# Altium PCB PCB1.PcbDoc
Units mil, origin at the board's own origin, x right, y up, seen from the top; angles counter-clockwise.
Board outline 7409.94 x 4335 mil, 4 copper layers (Top Layer 1, Power, Ground, Bottom Layer 1), stack 23.712 mil thick; 35 components, 28 nets, 160 pads, 26 vias.
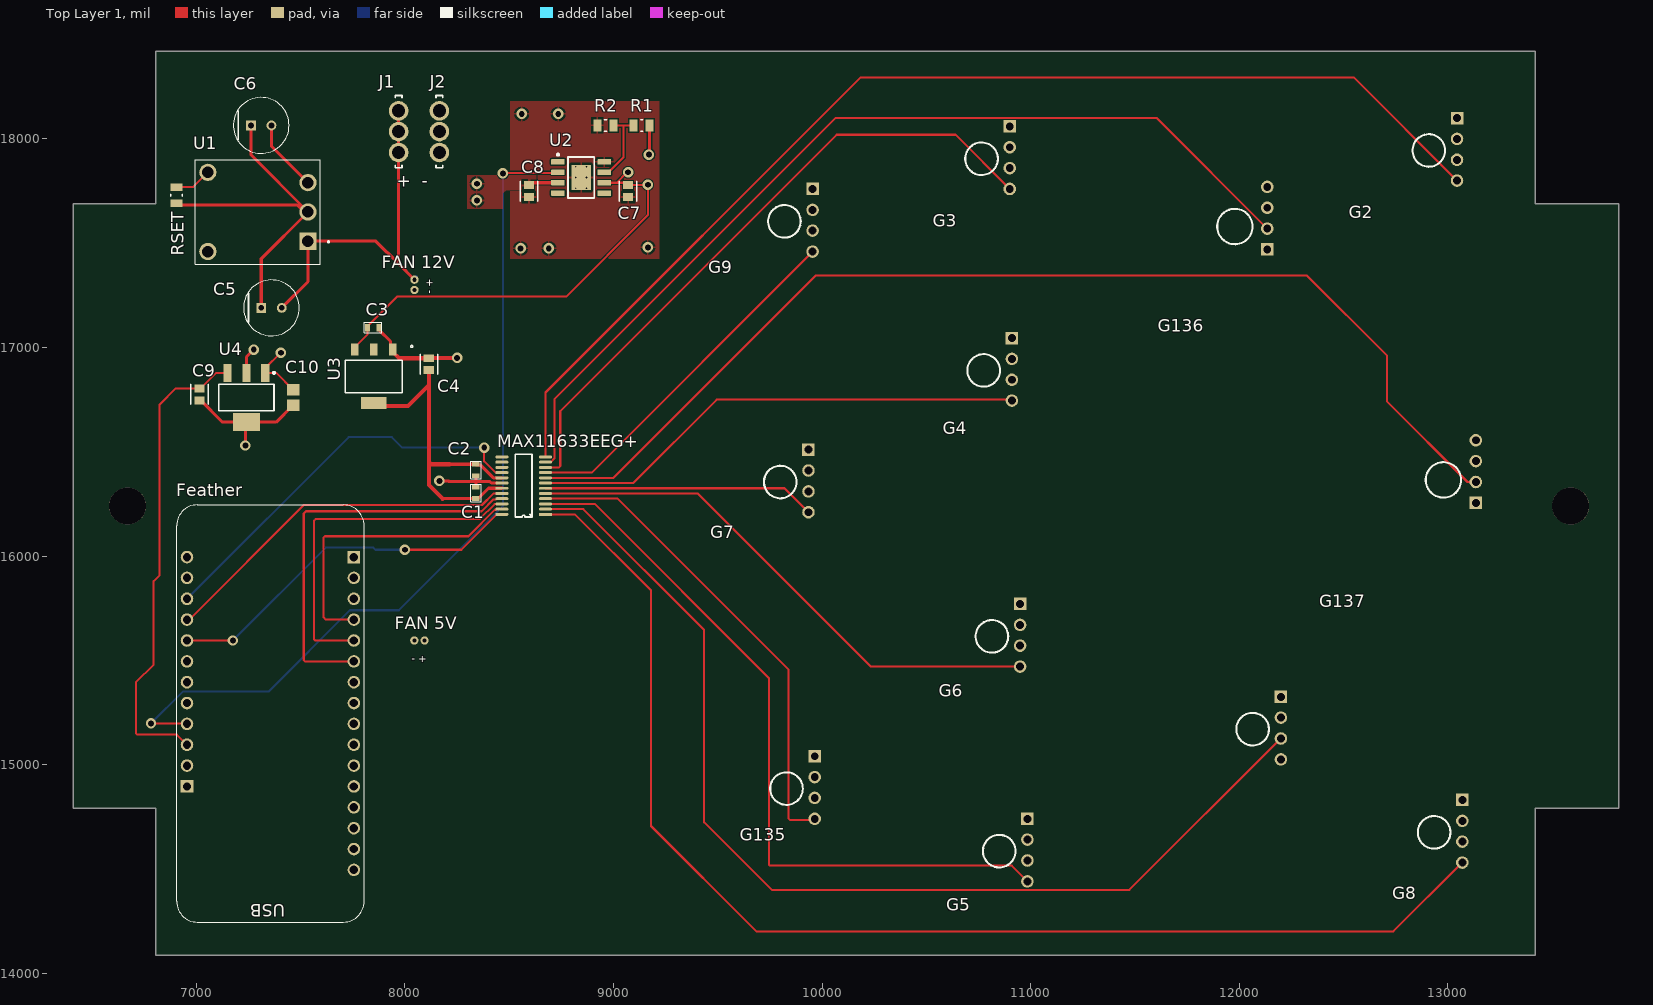
[diagram p0: Top Layer 1 view]
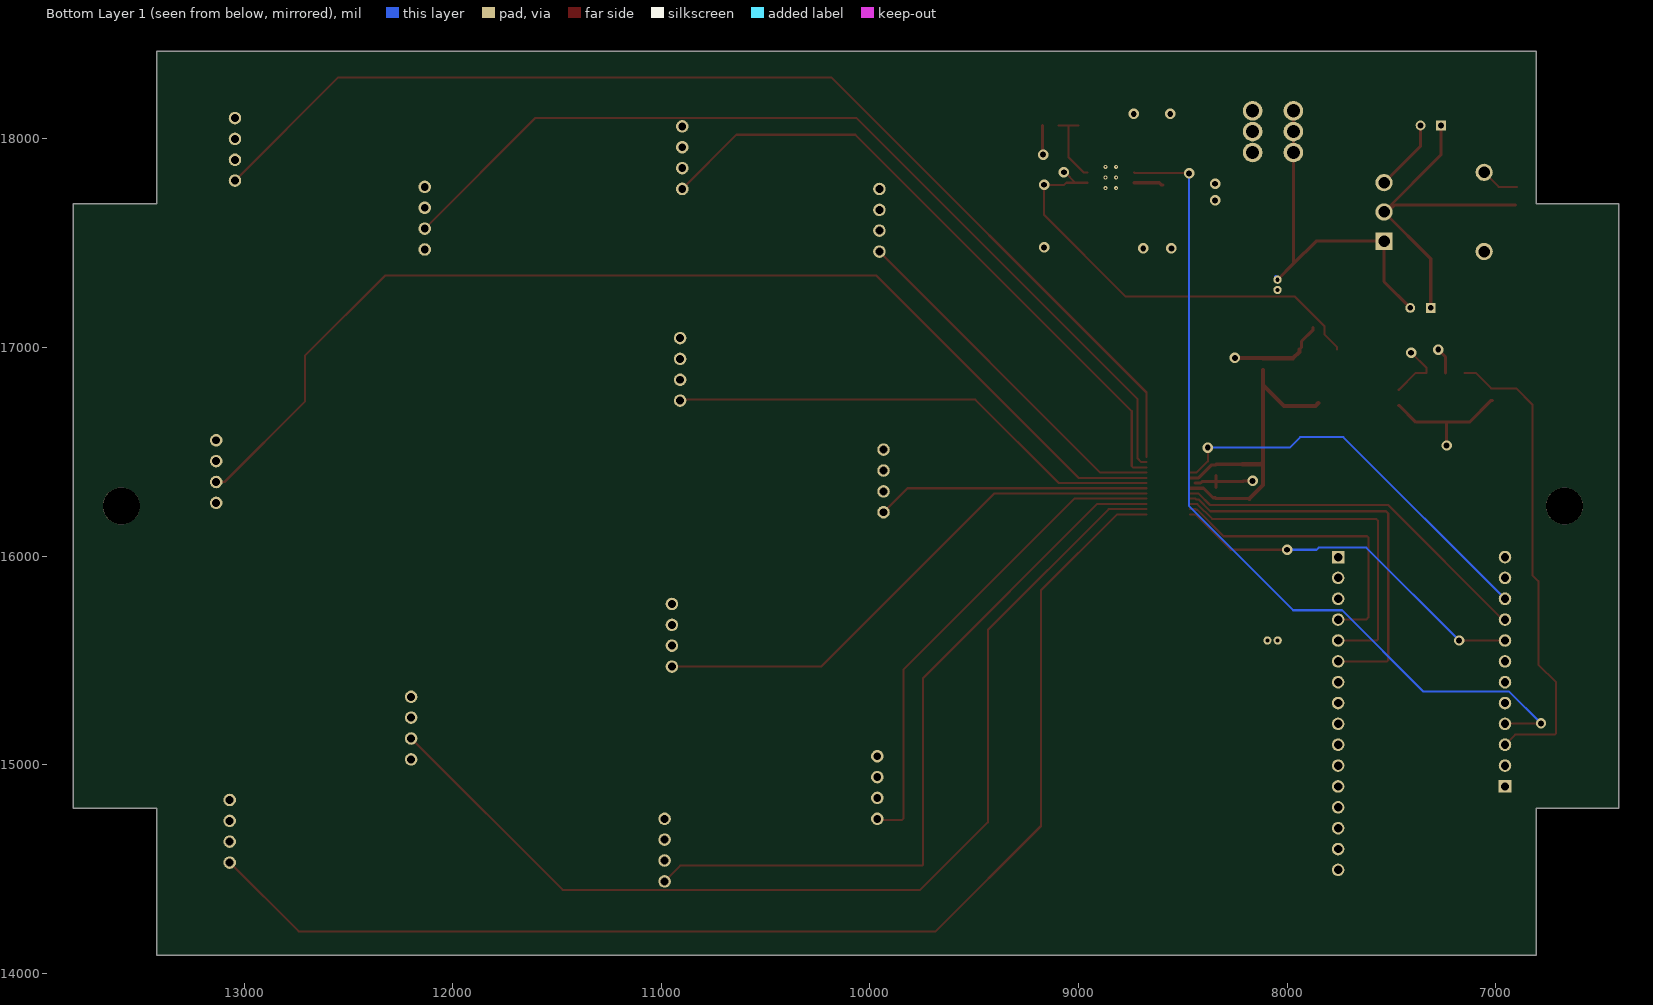
[diagram p1: Bottom Layer 1 view, seen from below]
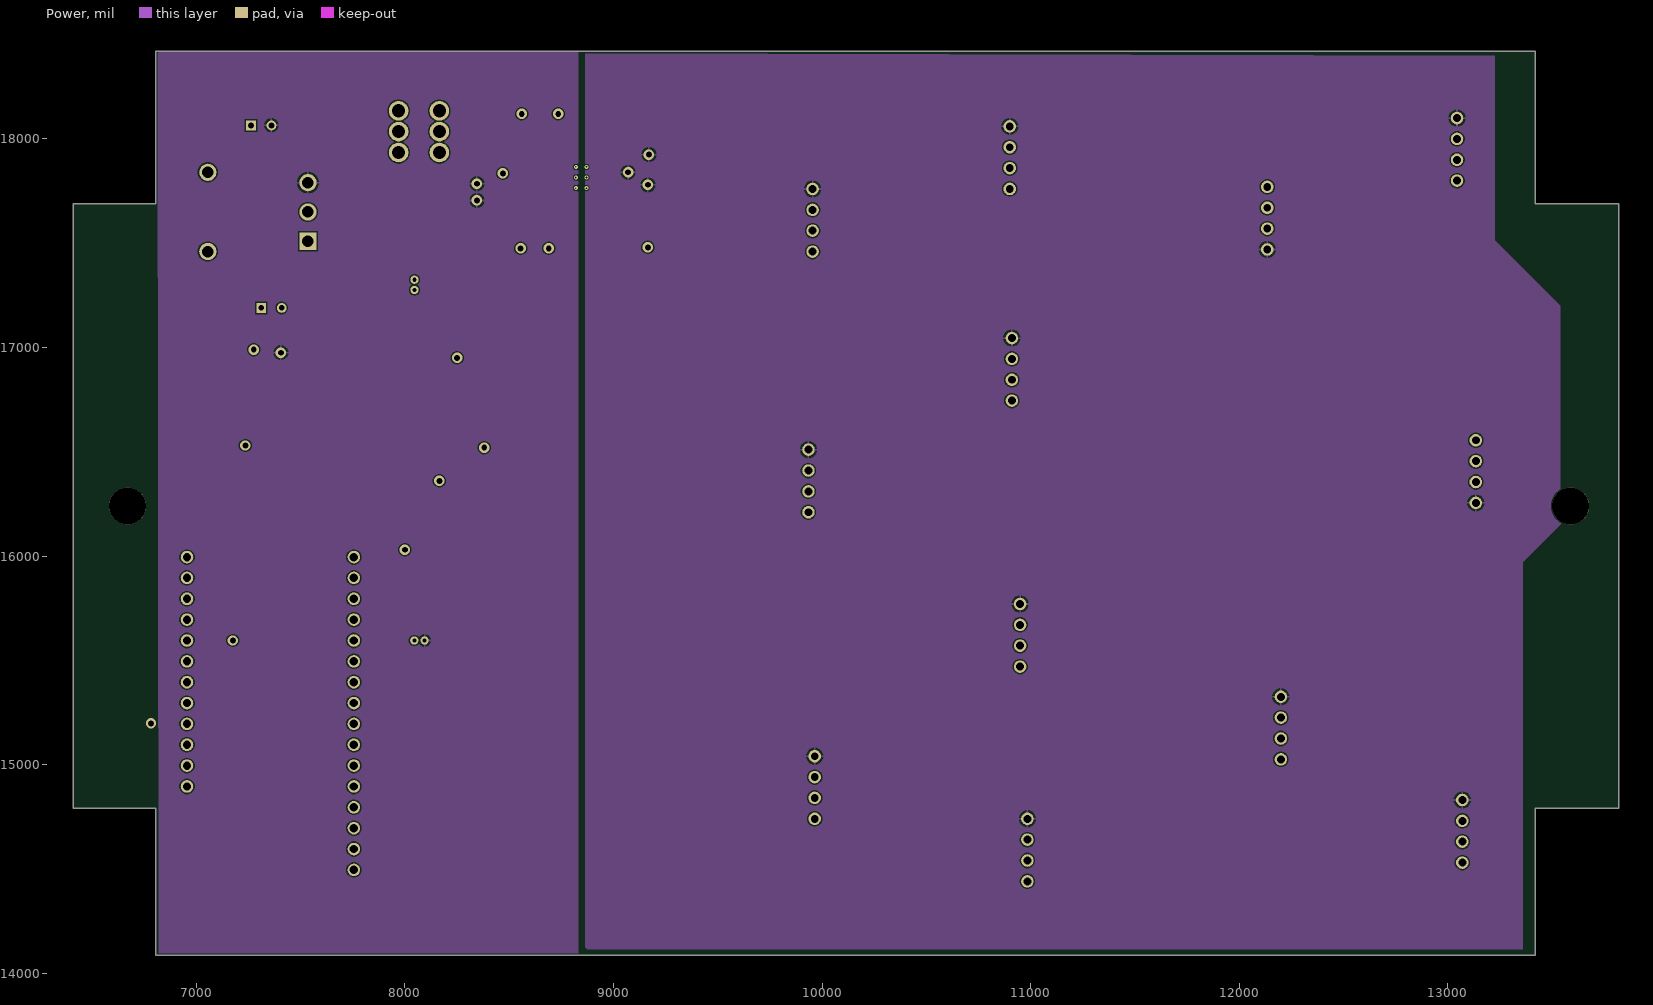
[diagram p2: Power]
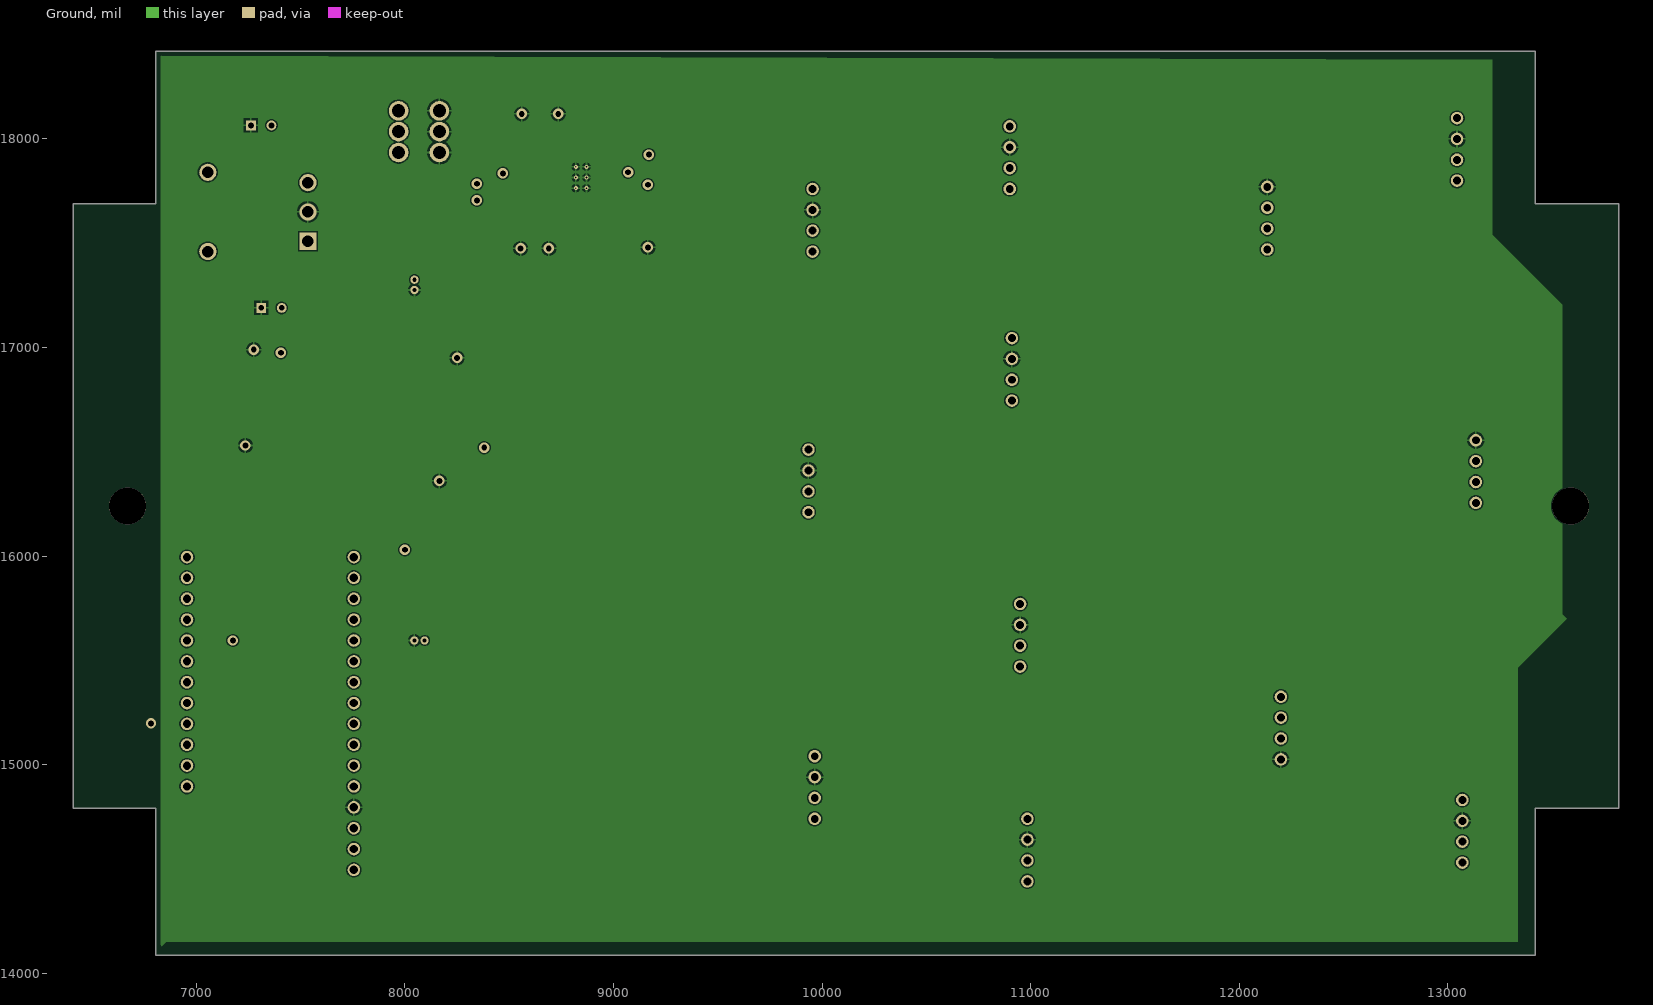
[diagram p3: Ground]
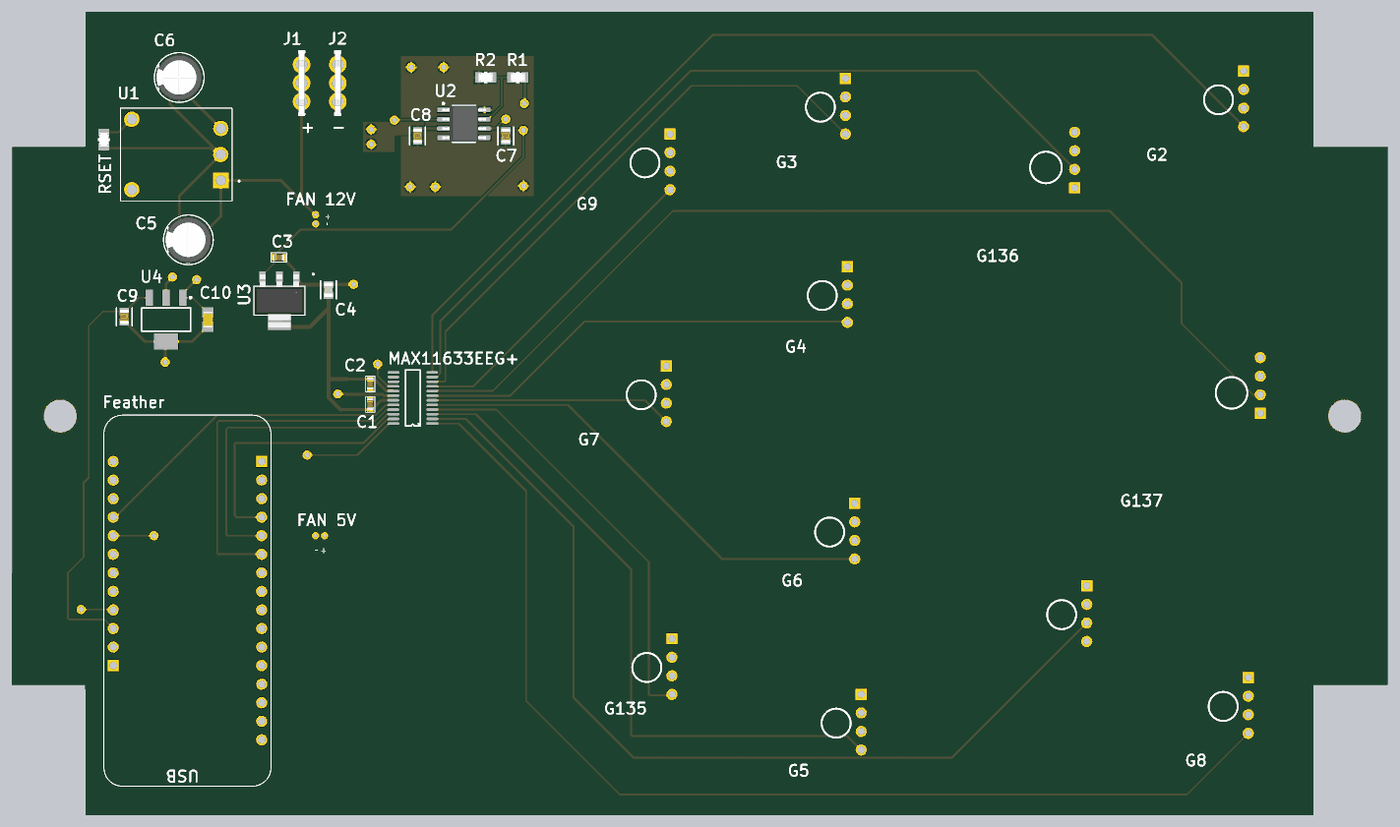
[diagram p4: 3D render of the assembled board from above, using the file's embedded part models]

## Layer stack, top to bottom
Top Solder: solder mask 0.4, Solder Resist, Dk 3.5
Top Layer 1: signal copper 1.378
Dielectric 2: prepreg 2.8, PP-006, Dk 4.1
Power: signal copper 1.378
Dielectric 1: dielectric 12.6, FR-4, Dk 4.8
Ground: signal copper 1.378
Dielectric 3: prepreg 2.8, PP-006, Dk 4.1
Bottom Layer 1: signal copper 1.378
Bottom Solder: solder mask 0.4, Solder Resist, Dk 3.5

## Board outline
13820,14790 13420,14790 13420,14085 6805,14085 6805,14790 6804.94,14789.94 6410.06,14789.94 6410.11,14790 6410.58,17690 6805,17690 6805,18420 13420,18420 13420,17690 13820,17690

## Design rules (kind name [scope] priority, off if disabled: settings)
Clearance [All] p1: gap=6 ignorepadtopadclearanceinfootprint=FALSE
Height [All] p1: minheight=0 maxheight=1929.13 prefheight=500
MinimumSolderMaskSliver [All] p1: minsoldermaskwidth=6
PolygonConnect [All] p1: connectstyle=Relief reliefconductorwidth=10 reliefentries=4 polygonreliefangle="90 Angle" airgapwidth=10
RoutingVias [All] p1: holewidth=28 width=50 viastyle="Through Hole" minholewidth=28 minwidth=50 maxholewidth=28 maxwidth=50
SilkToSolderMaskClearance [IsPad] p1: minsilkscreentomaskgap=1 clearancetoexposedcopper=TRUE
SolderMaskExpansion [All] p1: expansion=4 istentingtop=FALSE
SupplyNets "Schematic Supply Nets_1" [InNet('+12')] p1: voltage=0.000
SupplyNets "Schematic Supply Nets" [InNet('GND')] p2: voltage=0.000
Width Width_power [(InNet('3.3V') OR InNet('3.3_MCU') OR InNet('5.0V') OR InNet('5.4V') OR InNet('+12') OR InNet('GND'))] p1: maxlimit=20 minlimit=10 preferedwidth=15
Width [All] p2: maxlimit=10 minlimit=10 preferedwidth=10
27 further rules are at their usual default settings.

## Classes and differential pairs
component class Sheet3: C7 C8 C9 C10 R1 R2 U2 U4
component class Sheet2: " " G2 G3 G4 G5 G6 G7 G8 G9 G135 G136 G137
component class Sheet1: C1 C2 C3 C4 C5 C6 "FAN 5V" "FAN 12V" Feather J1 J2 MAX11633EEG+ RSET U1 U3

## Components (designator, comment, footprint, x,y, rotation, side; value= is the part's Value field where it differs from the comment)
C1 "0.1uF" CL10B104KB8NNWC 8340,16330 r270 top
C2 "0.1uF" CL10B104KB8NNWC 8340,16440 r270 top
C3 "0.1uF" CL10B104KB8NNWC 7820,17095 r0 top
C4 "2.2uF" FP-CL21F-IPC_C 8115,16920 r270 top
C5 "100uf" FP-RAD-TH-D_6_3_0_5-L_11-MFG 7360,17190 r0 top
C6 "100uF" FP-RAD-TH-D_6_3_0_5-L_11-MFG 7310.79,18065 r0 top
C7 "10uF" FP-GRM21B-0_1-IPC_C 9070,17750 r270 top
C8 "10uF" FP-GRM21B-0_1-IPC_C 8595,17750 r90 top
C9 "10uF" FP-GRM21B-0_1-IPC_C 7015,16775 r90 top
C10 "4.7uF" CAPC2013X135X45LL10T25 7465,16760 r90 top
"FAN 5V" "" "Molex 5021" 8094.21,15595 r180 top
"FAN 12V" "" "Molex 5021" 8045.79,17325 r270 top
Feather "Adafruit Feather M0" MODULE_FEATHER_M0_BASIC_PROTO 7355,15245 r90 top
G2 "MQ-Sensor" MQ-FOOTPRINT-B 13044.76,18099.82 r270 top
G3 "MQ-Sensor" MQ-FOOTPRINT-B 10900,18060 r270 top
G4 "MQ-Sensor" MQ-FOOTPRINT-B 10910,17045 r270 top
G5 "MQ-Sensor" MQ-FOOTPRINT-B 10984.76,14739.82 r270 top
G6 "MQ-Sensor" MQ-FOOTPRINT-B 10949.76,15769.82 r270 top
G7 "MQ-Sensor" MQ-FOOTPRINT-B 9934.76,16509.82 r270 top
G8 "MQ-Sensor" MQ-FOOTPRINT-B 13070,14830 r270 top
G9 "MQ-Sensor" MQ-FOOTPRINT-B 9954.76,17759.82 r270 top
G135 "MQ-Sensor" MQ-FOOTPRINT-B 9964.76,15039.82 r270 top
G136 "MQ-Sensor" MQ-FOOTPRINT-A 12135,17470 r90 top
G137 "MQ-Sensor" MQ-Footprint-A 13135,16255 r90 top
G138 "MQ-Sensor" MQ-FOOTPRINT-C 12199.76,15324.82 r270 top
J1 "216843-1" FP-216843-1-MFG 7970,18035 r270 top
J2 "216843-1" FP-216843-1-MFG 8165,18035 r90 top
MAX11633EEG+ "MAX11633EEG+" QSOP24 8674.06,16199.76 r180 top
R1 "274k" FP-CRCW0805-e3-MFG 9135,18065 r0 top
R2 "30.1k" FP-CRCW0805-e3-MFG 8961.61,18065 r0 top
RSET "160ohm" FP-CRCW0805-e3-MFG 6905,17730 r90 top
U1 "PTH08080W" VREG_PTH08080WAH 7294.96,17650.04 r180 top
U2 "TPS7A7001DDA" DDA0008E_M 8845,17815 r0 top
U3 "PTLV76118DCYR" SOT_8DCYR_TEX 7850.55,16861.5 r180 top
U4 "MCP1825S-5002E/DB" SOT-223-DB3_N 7240,16760 r270 top

## Footprints (in the part's own frame and the unit in brackets; to place one, negate y for a bottom-side part, rotate by r counter-clockwise, add the part's x,y. Pads: shape width x height; smd on the part's side, far side on the other; paste and mask are expansions set on the pad)
CAPC2013X135X45LL10T25 [mm] "Chip Capacitor, 2-Leads, Body 2.10x1.35mm, IPC High Density"
  rect 1.4x1.5 smd: 1(-0.95,0) 2(0.95,0)
  body extent -1.05,-0.67 1.05,0.67, height 1.35
CL10B104KB8NNWC [mm]
  rect 0.6x0.9 smd paste-2539.97 mask+0.051: 1(0,0) 2(1.397,0)
  silkscreen extent -0.38,-0.64 1.78,0.64, body extent -0.17,-0.4 1.44,0.4, height 0.9
DDA0008E_M [mm] "SOP, 8-Leads, Body 4x5mm, Pitch 1.27mm, Thermal Pad 2.4x3.1mm, IPC Low Density"
  rrect15% 1.65x0.65 smd: 1(-2.825,1.905) 2(-2.825,0.635) 3(-2.825,-0.635) 4(-2.825,-1.905) 5(2.825,-1.905) 6(2.825,-0.635) 7(2.825,0.635) 8(2.825,1.905)
  rrect4% 2.4x3.1 smd: 9(0,0)
  silkscreen extent -2.95,-2.5 1.6,2.9, body extent -2.98,-2.45 2.98,2.45, height 1.5
FP-216843-1-MFG [mm]
  round 2.39 hole 1.6 paste-2539.97 mask+0: 1(-2.54,0) 1(0,0) 1(2.54,0)
  silkscreen extent -4.4,-0.4 4.4,0.4, body extent -4.5,-1.3 4.5,1.3, height 0.25
FP-CL21F-IPC_C [mil]
  rect 37.71x49.69 smd paste+0 mask+0: 1(-28.63,0) 2(28.63,0)
  silkscreen extent -47,-42 47,42, body extent -51,-31 51,31, height 10
FP-CRCW0805-e3-MFG [mm]
  rect 0.95x1.45 smd paste+0 mask+0: 1(-0.975,0) 2(0.975,0)
  silkscreen extent -0.13,-0.7 0.13,0.7, body extent -1.55,-0.82 1.55,0.82, height 0.25
FP-GRM21B-0_1-IPC_C [mil]
  rect 37.71x49.69 smd paste+0 mask+0: 1(-28.63,0) 2(28.63,0)
  silkscreen extent -47,-42 47,42, body extent -51,-31 51,31, height 10
FP-RAD-TH-D_6_3_0_5-L_11-MFG [mm]
  rect 1.2x1.2 hole 0.7 paste-2539.97 mask+0: 1(-1.25,0)
  round 1.2 hole 0.7 paste-2539.97 mask+0: 2(1.25,0)
  silkscreen extent -3.4,-3.4 3.4,3.4, body extent -3.5,-3.5 3.5,3.5, height 0.25
MODULE_FEATHER_M0_BASIC_PROTO [mm]
  rect 1.53x1.53 / inner round 1.53 / far side rect 1.53x1.53 hole 1.02: 1(19.05,-10.16) 28(-8.89,10.16)
  round 1.53 hole 1.02: 2(16.51,-10.16) 3(13.97,-10.16) 4(11.43,-10.16) 5(8.89,-10.16) 6(6.35,-10.16) 7(3.81,-10.16) 8(1.27,-10.16) 9(-1.27,-10.16) 10(-3.81,-10.16) 11(-6.35,-10.16) 12(-8.89,-10.16) 13(-11.43,-10.16) 14(-13.97,-10.16) 15(-16.51,-10.16) 16(-19.05,-10.16) 17(19.05,10.16) 18(16.51,10.16) 19(13.97,10.16) 20(11.43,10.16) 21(8.89,10.16) 22(6.35,10.16) 23(3.81,10.16) 24(1.27,10.16) 25(-1.27,10.16) 26(-3.81,10.16) 27(-6.35,10.16)
  silkscreen extent -25.4,-11.43 25.4,11.43
"Molex 5021" [mm]
  round 1 hole 0.5 paste-2539.97 mask+0.051: 1(0,0) 2(1.25,0)
MQ-FOOTPRINT-A [mil]
  rect 60x60 / inner round 60 / far side round 60 hole 38 paste-99999 mask+2: 1(0,0)
  round 60 hole 38 paste-99999 mask+2: 2(100,0) 3(200,0) 4(300,0)
  silkscreen extent 25,70 195,240, body extent -614,-10 764,1061, height 1575
MQ-Footprint-A [mil]
  rect 60x60 / inner round 60 / far side round 60 hole 38 paste-99999 mask+2: 1(0,0)
  round 60 hole 38 paste-99999 mask+2: 2(100,0) 3(200,0) 4(300,0)
  silkscreen extent 25,70 195,240, body extent -614,-10 764,1061, height 1575
MQ-FOOTPRINT-B [mil]
  rect 60x60 / inner round 60 / far side round 60 hole 38 paste-99999 mask+2: 1(-0.18,0.24)
  round 60 hole 38 paste-99999 mask+2: 2(299.82,0.24) 3(199.82,0.24) 4(99.82,0.24)
  silkscreen extent 77,-213 233,-57, body extent -272,-669 515,9, height 1260
MQ-FOOTPRINT-C [mil]
  rect 60x60 / inner round 60 / far side round 60 hole 38 paste-99999 mask+2: 1(-0.18,0.24)
  round 60 hole 38 paste-99999 mask+2: 2(199.82,0.24) 3(99.82,0.24) 4(299.82,0.24)
  silkscreen extent 77,-213 233,-57, body extent -272,-669 515,9, height 1260
QSOP24 [mm]
  rect 1.6x0.36 smd mask+0.05: 1(0,0)
  oval 1.6x0.36 smd mask+0.05: 2(0,-0.636) 3(0,-1.272) 4(0,-1.908) 5(0,-2.544) 6(0,-3.18) 7(0,-3.816) 8(0,-4.452) 9(0,-5.088) 10(0,-5.724) 11(0,-6.36) 12(0,-6.996) 13(5.31,-6.996) 14(5.31,-6.36) 15(5.31,-5.724) 16(5.31,-5.088) 17(5.31,-4.452) 18(5.31,-3.816) 19(5.31,-3.18) 20(5.31,-2.544) 21(5.31,-1.908) 22(5.31,-1.272) 23(5.31,-0.636) 24(5.31,0)
  silkscreen extent 1.63,-7.31 3.68,0.32
SOT-223-DB3_N [mm] "SOT223, 4-Leads, Body 6.5x3.5mm, Pitch 2.3mm, Lead Span 7mm, IPC Medium Density"
  rect 2.2x1 smd: 1(-3,2.3) 2(-3,0) 3(-3,-2.3)
  rect 2.2x3.3 smd: 4(3,0)
  silkscreen extent -3.12,-3.35 1.6,3.48, body extent -1.85,-3.35 1.85,3.35, height 1.8
SOT_8DCYR_TEX [mil]
  rect 35x58 smd paste+0 mask+0: 1(-90.55,-128.5) 2(0,-128.5) 3(90.55,-128.5)
  rect 124x58 smd paste+0 mask+0: 4(0,128.5)
  silkscreen extent -187,-148 137,78, body extent -132,-144 132,144, height 71
VREG_PTH08080WAH [mm]
  rect 2.1x2.1 hole 1.4: 1(-6.095,3.56)
  round 2.1 hole 1.4: 2(-6.095,0) 3(-6.095,-3.56) 4(6.095,-4.825) 5(6.095,4.825)
  silkscreen extent -8.7,-6.35 7.62,6.35

## Part data
C1 C2 C3: library part CL10B104KB8NNWC, "No Description Available", Mfr_Name=Samsung, Copyright="Copyright (C) 2023 Ultra Librarian. All rights reserved.", Manufacturer_Part_Number=CL10B104KB8NNWC, RefDes=RefDes, Type=DEV
C4: library part CMP-13271-000021-1, "CAP CER 2.2UF 16V X7R 0805", Manufacturer="Samsung Electro-Mechanics America, Inc", Manufacturer Part Number=CL21B225KOFNNNE, Package=CL21F, Temperature="-55°C to +125°C", Temperature Characteristic=X7R, Temperature Coefficient=15%, Temperature Range High=+125°C, Temperature Range Low=-55°C, Tolerance=10%, Voltage Rating=16V, Automotive=No, Capacitance=2.2uF, Category=Cap, ComponentLink2Description=Datasheet, ComponentLink2URL=http://www.samsungsem.com/global/support/product-search/index.jsp, Device Class L1="Passive Components", Device Class L2=Capacitors, Device Class L3="Ceramic Capacitors", Digikey Description="CAP CER 2.2UF 16V X7R 0805", Height=1.35mm, Ipc Land Pattern Name=CAPC200125X125, Lead Free=Yes, Material=Ceramic, Octopart=https://octopart.com/cl21b225kofnnne-samsung-11855629, RoHS=TRUE
C5: library part CMP-05427-000856-1, "Aluminum Electrolytic Capacitors (Radial Lead Type) 100uF ±20% 25V", Capacitance=100uF, Case/Package=Radial, ESR (Equivalent Series Resistance)=130mR, Max Operating Temperature=105°C, Min Operating Temperature=-40°C, Package Quantity=2000, Ripple Current=455mA, Tolerance=20%, Voltage Rating=25V, Diameter=6mm, Height - Seated (Max)=0.5inch, Impedance=130mR, Lead Diameter=0.5mm, Lead Pitch=5mm, Length=11mm, Life (Hours)=2000Hour, Mount="Through Hole", Packaging="Tape and Reel", Polarity=Polar, RoHS Compliant=Yes, Series=FM, Termination=Radial, Voltage Rating (DC)=25V
C6: library part CMP-05427-000856-1, "Aluminum Electrolytic Capacitors (Radial Lead Type) 100uF ±20% 25V", Case/Package=Radial, ESR (Equivalent Series Resistance)=130mR, Max Operating Temperature=105°C, Min Operating Temperature=-40°C, Package Quantity=2000, Ripple Current=455mA, Tolerance=20%, Voltage Rating=25V, Capacitance=100uF, Diameter=6mm, Height - Seated (Max)=0.5inch, Impedance=130mR, Lead Diameter=0.5mm, Lead Pitch=5mm, Length=11mm, Life (Hours)=2000Hour, Mount="Through Hole", Packaging="Tape and Reel", Polarity=Polar, RoHS Compliant=Yes, Series=FM, Termination=Radial, Voltage Rating (DC)=25V
C7 C8 C9: library part CMP-2007-03453-2, "Chip Multilayer Ceramic Capacitors for General Purpose, 0805, 10uF, X5R, 15%, 10%, 16V", Case Code (Imperial)=0805, Case Code (Metric)=2012, Dielectric=X5R, Max Operating Temperature=85°C, Min Operating Temperature=-55°C, Package Quantity=1, Tolerance=10%, Voltage=16V, Capacitance=10uF, Case/Package=0805, Depth=1.25mm, Height=1.25mm, Lead Free="Lead Free", Length=2mm, Material=Ceramic, Mount="Surface Mount", Packaging="Tape and Reel", Radiation Hardening=No, REACH SVHC="No SVHC", Termination=SMD/SMT, Thickness=0.053inch, Voltage Rating=16V, Voltage Rating (DC)=16V, Width=1.25mm
C10: library part CMP-1662-00015-2, "Chip Capacitor, 4.7 uF, +/- 10%, 16 V, -55 to 85 degC, 0805 (2012 Metric), RoHS, Tape and Reel", Capacitance="4.7 uF", Case Code (Imperial)=0805, Case Code (Metric)=2012, Max Operating Temperature="85 degC", Min Operating Temperature="-55 degC", Package Quantity=3000, PartNumber=GRM21BR61C475KA88L, Tolerance=10%, Type (Capacitors)=X5R, Voltage Rating="16 V", Case\/Package=0805, ComponentLink1Description="Manufacturer URL", ComponentLink1URL=http://www.murata.com/, ComponentLink2Description=Datasheet, ComponentLink2URL=http://search.murata.co.jp/Ceramy/image/img/A01X/G101/ENG/GRM21BR61C475KA88-01.pdf, DatasheetVersion=03/2016, Height="1.25 mm", Length="2 mm", Mount="Surface Mount", Mounting Technology="Surface Mount", PackageDescription="2-Pin Surface Mount Device, Body 2 x 1.25 mm", PackageReference=0805, Packaging="Tape and Reel", Pins=2, Radiation Hardening=No, REACH SVHC="No SVHC", RoHSCompliant=true, Voltage Rating (DC)="16 V", Width="1.25 mm"
"FAN 5V" "FAN 12V": library part "MOLEX 5021"
Feather: "Adafruit Feather m0"
J1 J2: library part CMP-03369-000001-1, "CONN QC TAB 0.250 PRESS-FIT", Manufacturer=TE, Temperature="-30°C to +110°C", Temperature Range High=+110°C, Temperature Range Low=-30°C, Automotive=No, Category=Conn, ComponentLink2Description=Datasheet, ComponentLink2URL=https://www.te.com/usa-en/product-216843-1.html?te_bu=Cor&te_type=other&te_campaign=oct_glo_cor-oct-global-oth-prtnr-fy19-oct-octo-buy-bom_sma-298_2&elqCampaignId=35216, Conn Gender=Female, Conn Orientation=Straight, Contact Material=Tin, Device Class L1=Connectors, Device Class L2="Headers and Wire Housings", Device Class L3=unset, Digikey Description="CONN QC TAB 0.250 PRESS-FIT", Footprint Url=https://www.te.com/commerce/DocumentDelivery/DDEController?Action=showdoc&DocId=Customer+Drawing%7F216843%7FB1%7Fpdf%7FGerman%7FGER_CD_216843_B1.pdf%7F216843-1, Height=13.5mm, Is Female=yes, Lead Free=Yes, Manufacturer Part Number=216843-1, Mouser Description="Terminals .250 POS LOCK TAB", Number Of Contacts=1, Octopart=https://octopart.com/216843-1-te+connectivity-46512127, Package=216843-1
R1: library part CMP-2001-03738-2, "RES Thick Film, 274kΩ, 1%, 0.125W, 100ppm/°C, 0805", Case Code (Imperial)=0805, Case Code (Metric)=2012, Max Operating Temperature=155°C, Max Power Dissipation=125mW, Min Operating Temperature=-55°C, Package Quantity=10, Resistance=274kR, Temperature Coefficient=100ppm/°C, Tolerance=1%, Voltage Rating=150V, Case/Package=0805, Composition="Thick Film", Contact Plating=Tin, Depth=1.25mm, Features="Automotive AEC-Q200", Height=0.45mm, Lead Free="Lead Free", Length=2mm, Military Standard=Not, Number of Pins=2, Number of Terminations=2, Packaging="Tape and Reel", Power Rating=125mW, Radiation Hardening=No, Termination=SMD/SMT, Voltage Rating (DC)=150V, Weight=0.000194oz, Width=0.049inch
R2 RSET: library part CMP-2001-03804-2, "RES Thick Film, 30kΩ, 1%, 0.125W, 100ppm/°C, 0805", Case Code (Imperial)=0805, Case Code (Metric)=2012, Max Operating Temperature=155°C, Max Power Dissipation=125mW, Min Operating Temperature=-55°C, Package Quantity=10, Resistance=30kR, Temperature Coefficient=100ppm/°C, Tolerance=1%, Voltage Rating=150V, Case/Package=0805, Composition="Thick Film", Contact Plating=Tin, Depth=1.25mm, Features="Automotive AEC-Q200", Height=0.45mm, Lead Free="Lead Free", Length=2mm, Military Standard=Not, Mount="Surface Mount", Number of Pins=2, Number of Terminations=2, Packaging="Tape and Reel", Power Rating=125mW, Radiation Hardening=No, Termination=SMD/SMT, Voltage Rating (DC)=150V, Weight=0.000194oz, Width=0.049inch
U2: library part CMP-0395-00551-2, "Single Output Very Low Input LDO, 2 A, Adjustable 0.9 to 5 V Output, 1.5 to 6.5 V Input, 8-pin SOPowerPAD (DDA), -40 to 125 degC, Green (RoHS & no Sb/Br)", Manufacturer="Texas Instruments", Accuracy(%)=2, Code_JEDEC=MS-012, ComponentLink1Description="Manufacturer URL", ComponentLink1URL=http://www.ti.com/, ComponentLink2Description=Datasheet, ComponentLink2URL=http://www.ti.com/general/docs/lit/getliterature.tsp?genericPartNumber=TPS7A7001&fileType=pdf, ComponentLink3Description="Package Specification", ComponentLink3URL=http://www.ti.com/litv/pdf/mpds092e, DatasheetVersion=SBVS134B, Eco-Plan="Green (RoHS & no Sb/Br)", Iout(Max)(A)=2, Iq(Typ)(mA)=0.01, Mounting Technology="Surface Mount", PackageDescription="8-Pin Plastic Small Outline, Body 3.9 x 4.9 mm, Pitch 1.27 mm", PackageReference=DDA0008E, PackageVersion=4202561/F, PartNumber=TPS7A7001DDA, SubFamily="Single Channel LDO", Vdo(Typ)(mV)=170, Vin(Max)(V)=6.5, Vin(Min)(V)=1.5, Vout Adj(Max)(V)=5, Vout Adj(Min)(V)=0.9
U3: "No Description Available", Mfr_Name="Texas Instruments", Copyright="Copyright (C) 2023 Ultra Librarian. All rights reserved.", Manufacturer_Part_Number=PTLV76118DCYR, RefDes=RefDes, Type=DEV
U4: library part CMP-0136-00456-1, "500 mA, Low Voltage, Low Quiescent Current LDO Regulator, 3-Pin SOT-223, Extended Temperature", DatasheetVersion="revB, Feb-2008", PackageDescription="3-Lead Plastic Small Outline Transistor (DB) [SOT-223]", PackageReference=SOT-223-DB3, PackageVersion="revBB, Aug-2009"

## Free pads (board coordinates)
  round 177.17 hole 177.17 paste-99999 mask+2: q10(6670,16240) q11(13590,16240)

## Via types
v1: diameter 50, hole 28, Top Layer 1 to Bottom Layer 1, 20 vias
v2: diameter 19.68, hole 7.87, Top Layer 1 to Bottom Layer 1, tented top, 6 vias

## Nets (pads, with @x,y where several pads share a name; then routed paths per layer and width w, separated by ;. In a path a pad name is that pad's centre, name@x,y a point inside that pad or via, vN(x,y) a via of type N, cw(c..) or ccw(c..) an arc to the next point about the centre after c; other vN are vias at no path point)
3.3_MCU: Feather.15
3.3V: C1.2 C2.1 C4.2 MAX11633EEG+.17 MAX11633EEG+.19 U3.4 | length 1641.3
  Top Layer 1 w15: 8180,16275 C1.2 8344.31,16279.31 8355.3,16279.31 8400.94,16324.96 MAX11633EEG+.19 ; 8215,16440 C2.1 8344.31,16435.69 8363.48,16435.69 8424.13,16375.04 MAX11633EEG+.17
  Top Layer 1 w20: U3.4 7863.55,16720 8015,16720 8115,16820 ; C4.2 8115,16820 ; 8180,16275 8115,16340 8115,16450 ; 8215,16440 8125,16440 8115,16450 ; 8115,16450 8115,16820
5.0V: C3.1 C7.1 G2.1 G3.1 G4.1 G5.1 G6.1 G7.1 G8.1 G9.1 G135.1 G136.1 G137.1 G138.1 R1.2 U2.6 U3.3 | length 2278.2
  Top Layer 1 w10: U3.3 7760,17001.5 7820,17061.5 C3.1 7820,17100.91 7964.2,17245.1 8775.1,17245.1 9165,17635 v1(9165,17780) 9071.37,17780 C7.1 9058.63,17790 9015,17790 ; U2.6 9015,17790 ; v1(9070,17840) 9065,17840 9015,17790
  Top Layer 1 w15: v1(9170,17925) 9173.39,17928.39 R1.2
5.0V_MCU: C9.2 Feather.26 U4.3 | length 2280.2
  Top Layer 1 w10: Feather.26 6906.4,15143.6 6715.86,15143.6 6710,15149.46 6710,15394.36 6795,15479.36 6795,15878.9 6823.68,15907.58 6823.68,16726.45 6900.86,16803.63 C9.2 7020.99,16803.63 7095.47,16878.11 U4.3
5.4V: "FAN 5V.1" C6.2 C8.2 C10.2 U1.3 U2.3 U4.1 | length 787.1
  Top Layer 1 w10: v1(7405,16975) 7403.82,16975 7330.55,16901.73 U4.1 7382.32,16878.11 7463.03,16797.4 C10.2
  Top Layer 1 w15: C6.2 7360,17965.12 U1.3@7534.96,17790.16 ; C8.2 8600.99,17778.63 8612.36,17790 U2.3
  other v1: 8345,17705 8345,17785
+12: "FAN 12V.1" C5.2 J1.1 U1.1 | length 1713.2
  Top Layer 1 w15: C5.2 7534.96,17315.75 7534.96,17509.84 7860.95,17509.84 7970,17400.79 ; J1.1@7970,18135 7970,18035 7970,17935 7970,17400.79 ; 8045.79,17325 7970,17400.79
  Bottom Layer 1 w15: 8045.79,17325 8045.79,17331.59 8055,17340.81
\C\S: Feather.20 MAX11633EEG+.20 | length 1760.6
  Top Layer 1 w10: Feather.20 6965.1,15695 7515.05,16244.95 8369.69,16244.95 8423.86,16299.12 8464.2,16299.12 MAX11633EEG+.20
AIN0: G8.2 MAX11633EEG+.1 | length 6023.2
  Top Layer 1 w10: MAX11633EEG+.1 8815.24,16199.76 9179.79,15835.22 9179.79,14705.22 9685,14200 12740.06,14200 G8.2
AIN1: G138.2 MAX11633EEG+.2 | length 5122.9
  Top Layer 1 w10: MAX11633EEG+.2 8855.2,16224.8 9435,15645 9435,14723.23 9759.23,14399 11474,14399 G138.2
AIN2: G5.2 MAX11633EEG+.3 | length 3584.3
  Top Layer 1 w10: MAX11633EEG+.3 8910.16,16249.84 9745,15415 9745,14521.07 9750.86,14515.21 10909.79,14515.21 G5.2
AIN3: G135.2 MAX11633EEG+.4 | length 2349.2
  Top Layer 1 w10: MAX11633EEG+.4 9020.12,16274.88 9840,15455 9840,14740.86 9845.86,14735 9960,14735 G135.2
AIN4: G6.2 MAX11633EEG+.5 | length 2619.7
  Top Layer 1 w10: MAX11633EEG+.5 9403.47,16299.92 10233.39,15470 G6.2
AIN5: G7.2 MAX11633EEG+.6 | length 1308.6
  Top Layer 1 w10: MAX11633EEG+.6 9820.04,16324.96 G7.2
AIN6: G4.2 MAX11633EEG+.7 | length 2403.9
  Top Layer 1 w10: MAX11633EEG+.7 9095,16350 9495,16750 10905.41,16750 G4.2
AIN7: G137.2 MAX11633EEG+.8 | length 5413.7
  Top Layer 1 w10: MAX11633EEG+.8 9000.04,16375.04 9970,17345 12325,17345 12710,16960 12710,16740 13095,16355 G137.2 13140,16355 G137.2@13145,16350
AIN8: G9.2 MAX11633EEG+.9 | length 1720
  Top Layer 1 w10: MAX11633EEG+.9 8895.08,16400.08 G9.2
AIN9: G3.2 MAX11633EEG+.10 | length 3149.1
  Top Layer 1 w10: MAX11633EEG+.10 8739.14,16425.12 8745,16430.98 8745,16695 10070,18020 10640.41,18020 G3.2
AIN10: G136.2 MAX11633EEG+.11 | length 4531.1
  Top Layer 1 w10: MAX11633EEG+.11 8699,16450.16 8716.55,16467.71 8716.55,16751.55 10066.18,18101.18 11603.82,18101.18 G136.2
AIN11: G2.2 MAX11633EEG+.12 | length 5510.7
  Top Layer 1 w10: MAX11633EEG+.12 8674.06,16784.06 10185,18295 12550,18295 G2.2
CNVST: Feather.19 MAX11633EEG+.16 | length 1939.8
  Top Layer 1 w10: v1(8380,16520) 8380,16454.47 8433.6,16400.88 8464.2,16400.88 MAX11633EEG+.16
  Bottom Layer 1 w10: Feather.19 7730,16570 7937.09,16570 7987.09,16520 v1(8380,16520)
EN: Feather.25 U2.2 | length 4154.1
  Top Layer 1 w10: v1(6782.5,15197.5) 6952.5,15197.5 Feather.25 ; v1(8470,17835) 8472.5,17837.5 8731.28,17837.5 U2.2
  Bottom Layer 1 w10: v1(6782.5,15197.5) 6934.88,15349.88 7346.08,15349.88 7736.31,15740.12 7970.83,15740.12 8470,16239.29 v1(8470,17835)
EOC: Feather.21 MAX11633EEG+.24 | length 1768.9
  Top Layer 1 w10: Feather.21 v1(7175,15595) ; v1(8000,16030) 8270.83,16030 8440.59,16199.76 MAX11633EEG+.24
  Bottom Layer 1 w10: v1(7175,15595) 7620.12,16040.12 7848.86,16040.12 7858.98,16030 v1(8000,16030)
GND: "FAN 5V.2" "FAN 12V.2" C1.1 C2.2 C3.2 C4.1 C5.1 C6.1 C7.2 C8.1 C9.1 C10.1 Feather.13 G2.4 G3.4 G4.4 G5.4 G6.4 G7.4 G8.4 G9.4 G135.4 G136.4 G137.4 G138.4 J2.1 MAX11633EEG+.18 R2.1 RSET.1 U1.2 U2.8 U2.9 U3.1 U4.2 U4.4 | length 3300.2
  Top Layer 1 w15: RSET.1@6905,17683.7 7482.95,17683.7 7516.65,17650 U1.2@7534.96,17650 ; C9.1 7020.99,16746.37 7125.47,16641.89 U4.4 ; v1(7235,16530) 7235,16636.89 U4.4 ; U4.2 7240,16955 v1(7275,16990) ; C6.1 7261.58,17923.38 U1.2@7534.96,17650 ; C5.1 7310.79,17425.83 U1.2@7534.96,17650 ; C10.1 7463.03,16722.6 7382.32,16641.89 U4.4 ; U1.2@7553.27,17650 U1.2@7534.96,17650 ; C3.2 7875,17085.16 7931.1,17029.05 7931.1,17000 U3.1 ; v1(8165,16360) 8210,16360 ; 8210,16357.5 8340,16357.5 ; C1.1 8340,16357.5 ; C2.2 8340,16357.5 ; 8350,16357.5 8407.06,16357.5 8414.6,16349.96 MAX11633EEG+.18@8441,16349.96
  Top Layer 1 w20: U3.1 7941.1,16978.5 7970.97,16948.63 C4.1 8115.69,16949.31 8249.32,16949.31 v1(8250,16950)
  other v1: 8555,17475 8690,17475 9165,17480 8560,18120 8735,18120
  other v2: 8819.41,17763.82 8870.59,17763.82 8819.41,17815 8870.59,17815 8819.41,17866.18 8870.59,17866.18
MISO: Feather.4 MAX11633EEG+.23 | length 1444
  Top Layer 1 w10: Feather.4 7620.86,15695 7610,15705.86 7610,16089.14 7615.86,16095 8304.59,16095 8431.44,16221.85 8436.51,16221.85 8439.46,16224.8 MAX11633EEG+.23
MOSI: Feather.5 MAX11633EEG+.22 | length 1694.6
  Top Layer 1 w10: Feather.5 7570.86,15595 7565,15600.86 7565,16170 7573.17,16178.17 8359.48,16178.17 8430.35,16249.04 8464.2,16249.04 MAX11633EEG+.22
NetR1_1: R1.1 R2.2 U2.7 | length 371.3
  Top Layer 1 w10: U2.7 8975.91,17840 9048.31,17912.4 9048.31,18065 ; R2.2 9048.31,18065 ; R1.1 9048.31,18065
NetRSET_2: RSET.2 U1.4 | length 186.7
  Top Layer 1 w10: RSET.2@6897.3,17770 6985.08,17770 U1.4
SCK: Feather.6 MAX11633EEG+.21 | length 1925
  Top Layer 1 w10: Feather.6 7520.86,15495 7515,15500.86 7515,16204.14 7525.67,16214.81 8367.83,16214.81 8424.95,16271.93 8436.51,16271.93 8439.46,16274.88 MAX11633EEG+.21
pads on no net: Feather.1 Feather.2 Feather.3 Feather.7 Feather.8 Feather.9 Feather.10 Feather.11 Feather.12 Feather.14 Feather.16 Feather.17 Feather.18 Feather.22 Feather.23 Feather.24 Feather.27 Feather.28 G2.3 G3.3 G4.3 G5.3 G6.3 G7.3 G8.3 G9.3 G135.3 G136.3 G137.3 G138.3 MAX11633EEG+.13 MAX11633EEG+.14 MAX11633EEG+.15 U1.5 U2.1 U2.4 U2.5 U3.2

## Polygon pours and split planes (outlines as drawn)
5.0V on Power "SENSOR_PWR" (solid, pour order 4): 8865,18410 8865,14125 8875,14115 13360,14115 13360,15970 13570,16180 13540,16210 13540,17200 13225,17515 13225,18400
5.4V on Power "5.2_PWR" (solid, pour order 2): 6815,18410 6820,18415 8830,18415 8830,14095 6820,14095
GND on Top Layer 1 "GND" (solid, remove dead copper, pour order 13): 8505,18180 8505,17425 9220,17425 9220,18180
5.4V on Top Layer 1 "5.4_TOP" (solid, pour order 12): 8300,17665 8470,17665 8470,17740 8485,17755 8630,17755 8630,17825 8300,17825
GND on Ground "GND" (solid, pour order 3): 6830,18400 6830,14135 6835,14130 6855,14150 13335,14150 13335,15465 13570,15700 13550,15720 13550,17205 13215,17540 13215,18380

## Silkscreen, mask and mechanical layers (free items; w line width, h text height)
Top Overlay:
  text "+  -" at 7960,17770 h60
Bottom Overlay:

## Text inside footprints (layer, text, board x,y; h text height)
"FAN 5V": Top Overlay "+ -" at 8104.21,15531.2 h60 r180
"FAN 12V": Top Overlay "+ -" at 8093.8,17330 h60 r270
Feather: Top Overlay "USB" at 7424.96,14330.04 h60 r180